# Altium PCB carteAction2026v1.PcbDoc
Units mm, origin at the board's own origin, x right, y up, seen from the top; angles counter-clockwise.
Board outline 121.28 x 58.42 mm, 2 copper layers (Top Layer, Bottom Layer); 49 components, 46 nets, 177 pads, 2 vias.
Unrouted connection lines stored in the file: 1.
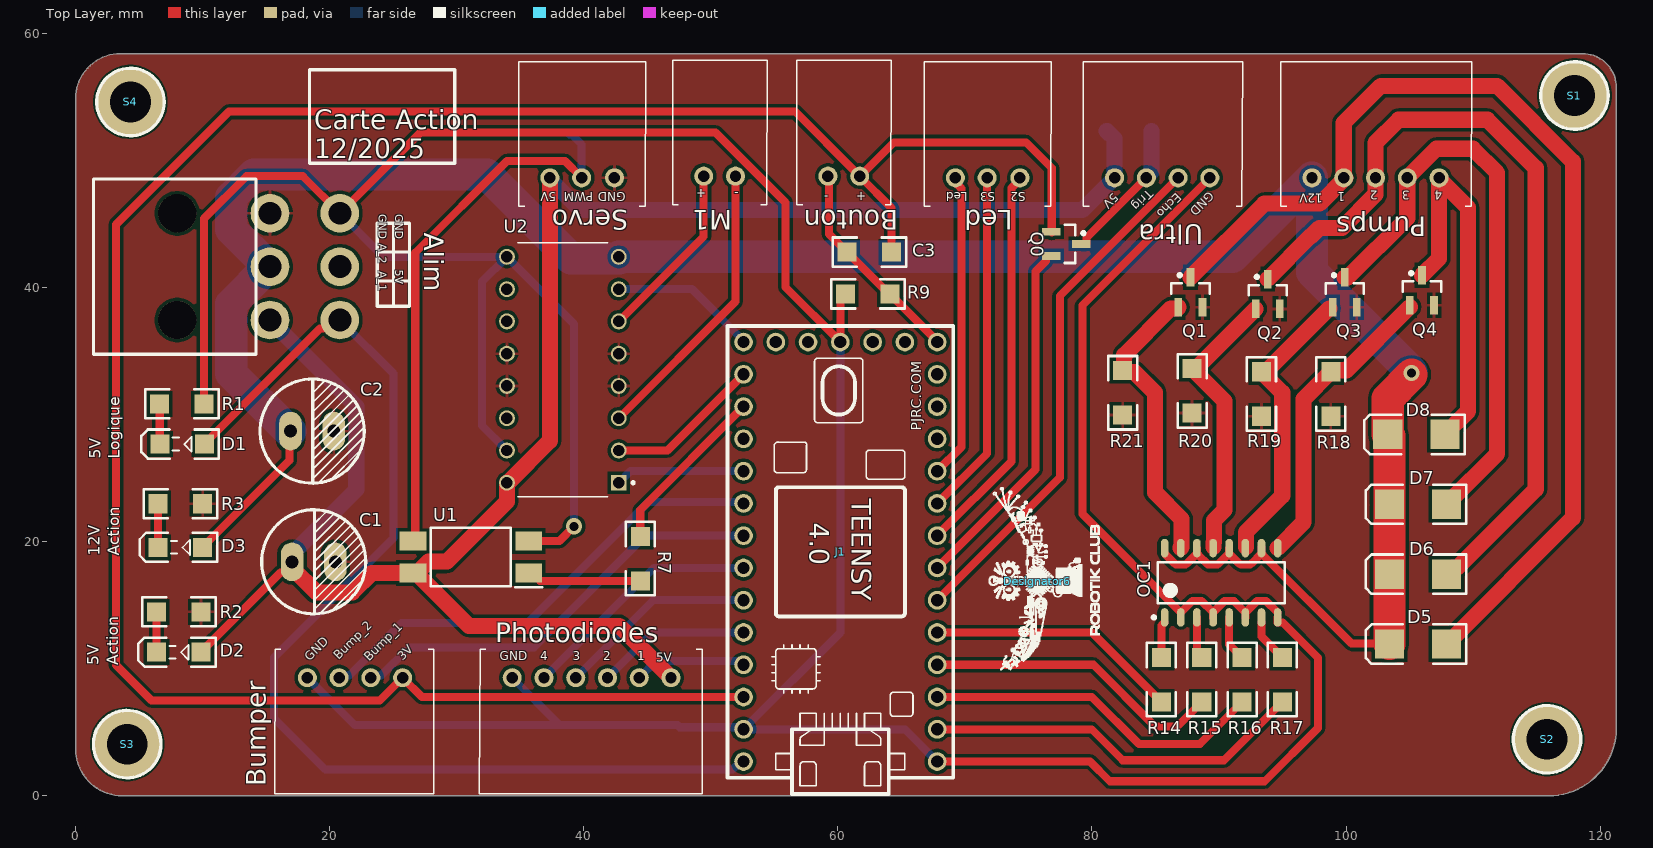
[diagram p0: Top Layer view]
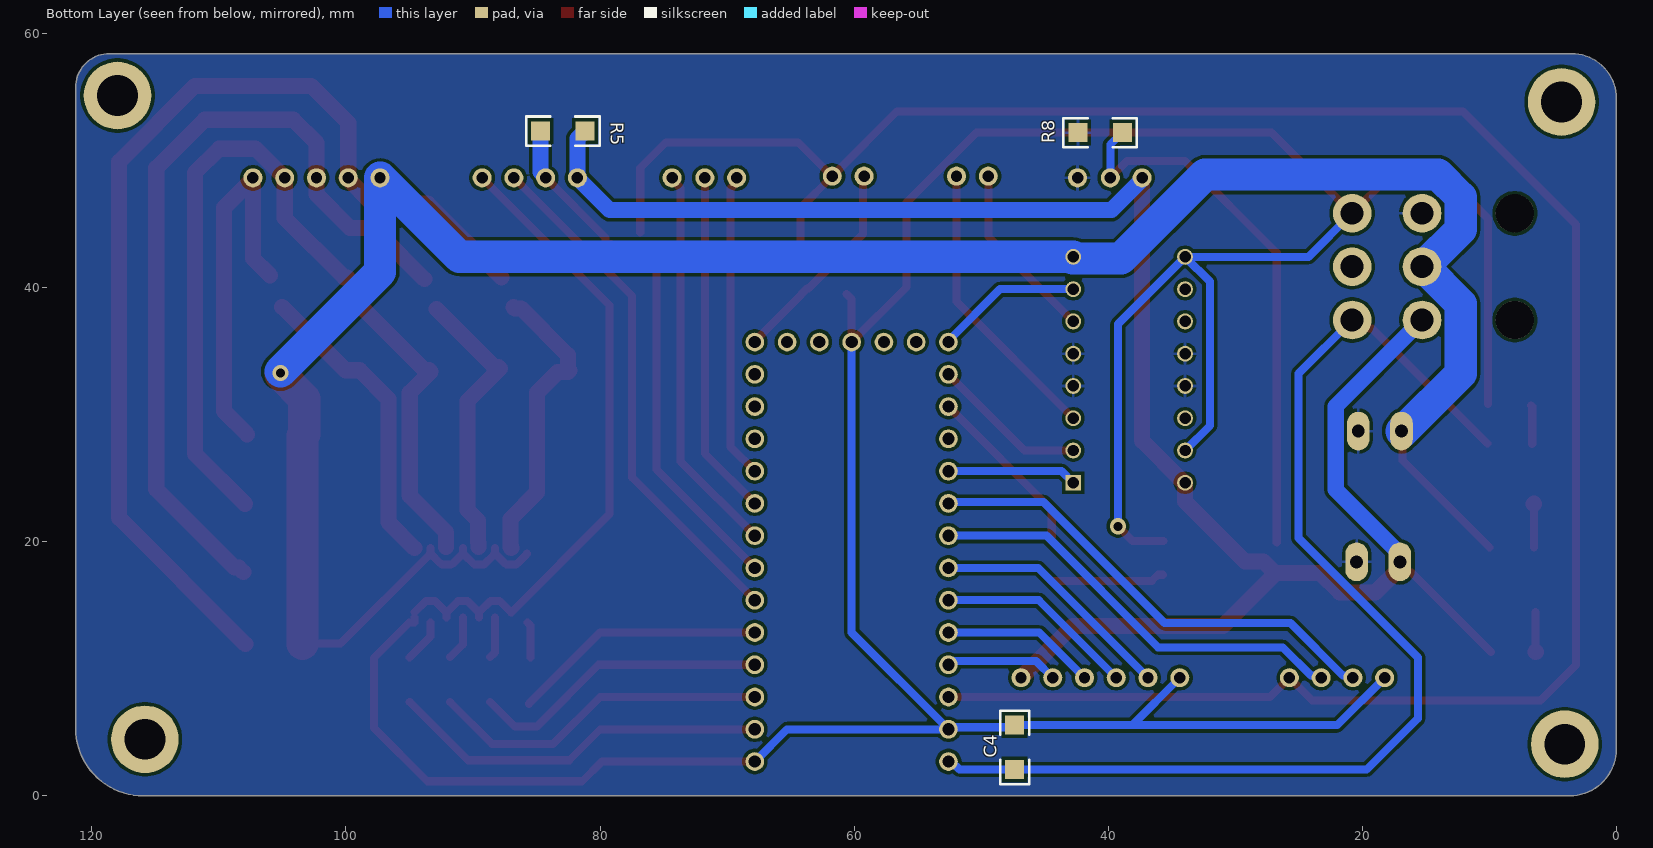
[diagram p1: Bottom Layer view, seen from below]
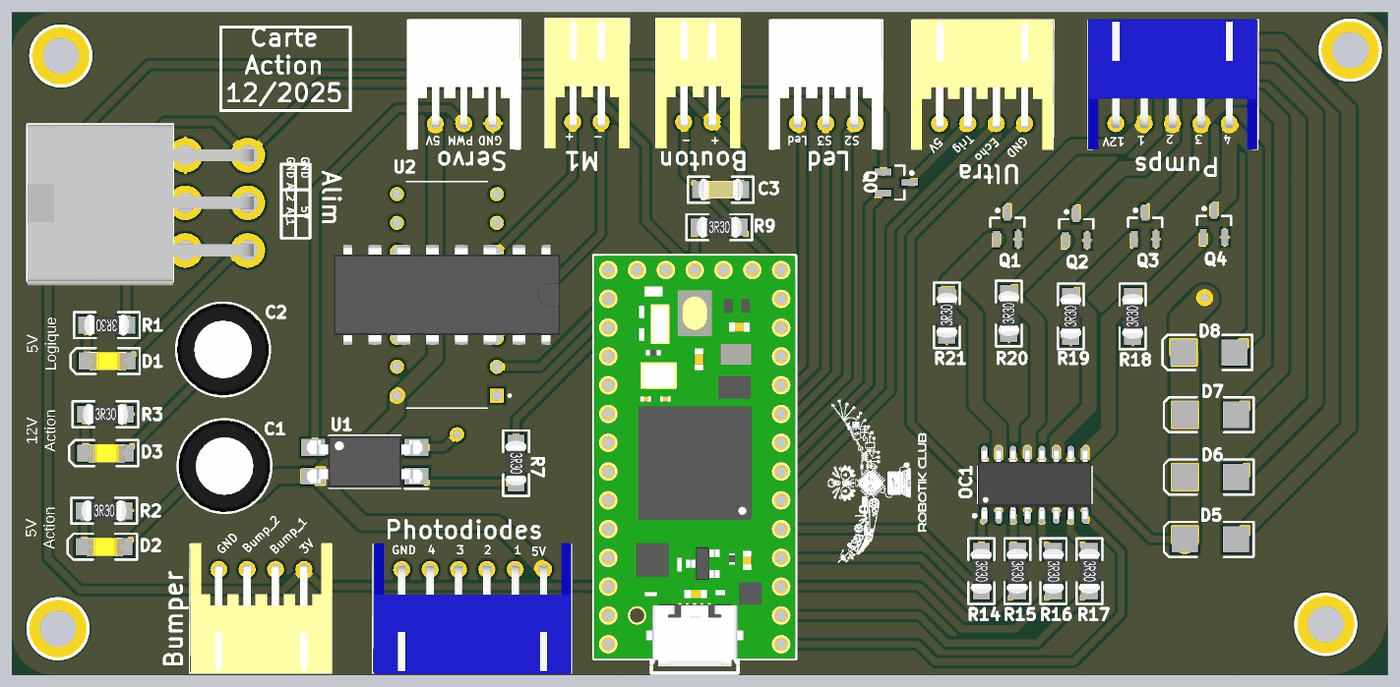
[diagram p2: 3D render of the assembled board from above, using the file's embedded part models]
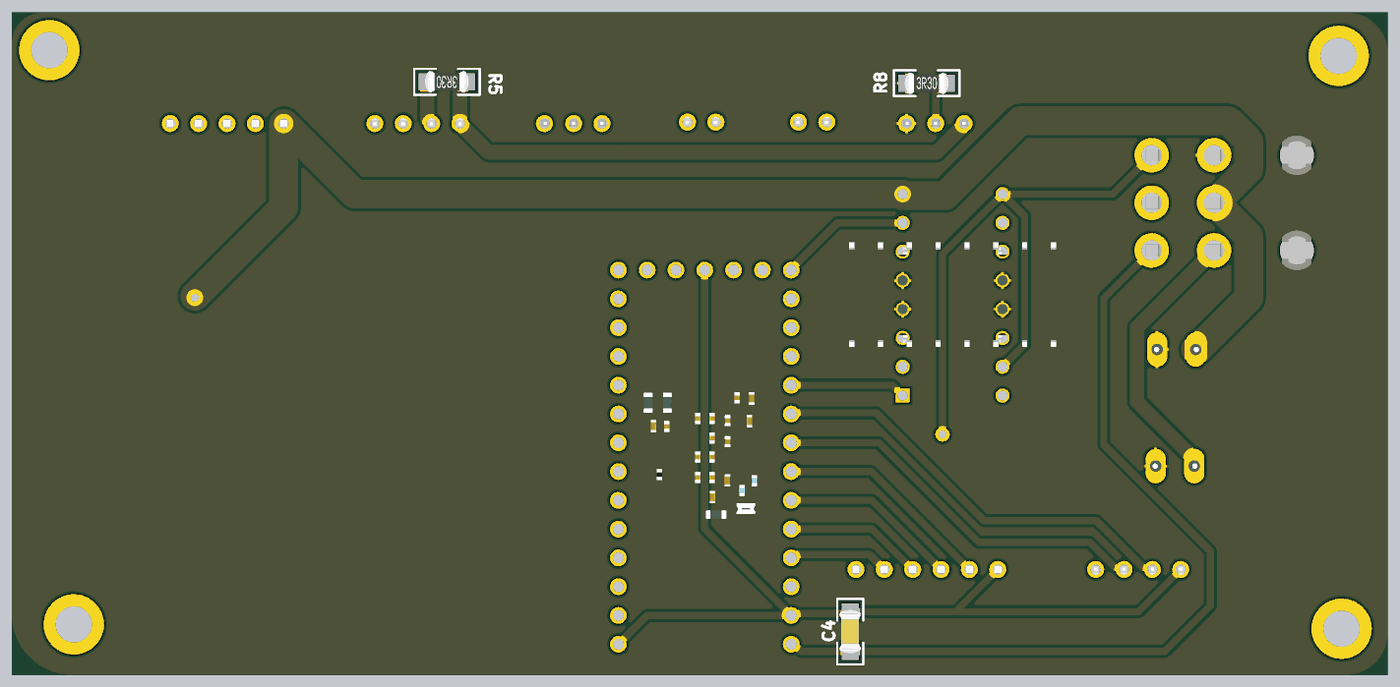
[diagram p3: 3D render of the assembled board from below, using the file's embedded part models]

## Layer stack, top to bottom
Top Solder: solder mask 0.0102, Solder Resist, Dk 3.5
Top Layer: signal copper 0.0356
Dielectric 1: dielectric 0.32, FR-4, Dk 4.8
Bottom Layer: signal copper 0.0356
Bottom Solder: solder mask 0.0102, Solder Resist, Dk 3.5

## Board outline
3.683,0 115.951,0 ccw(c115.951,5.334) 121.285,5.334 121.285,55.753 ccw(c118.618,55.753) 118.618,58.42 3.556,58.42 ccw(c3.556,54.864) 0,54.864 0,3.683 ccw(c3.683,3.683)

## Design rules (kind name [scope] priority, off if disabled: settings)
Clearance [All] p1: gap=0.254 ignorepadtopadclearanceinfootprint=FALSE
PolygonConnect [All] p1: connectstyle=Relief reliefconductorwidth=0.254 reliefentries=4 polygonreliefangle="90 Angle" airgapwidth=0.254
RoutingVias [All] p1: holewidth=0.711 width=1.27 viastyle="Through Hole" minholewidth=0.711 minwidth=1.27 maxholewidth=0.711 maxwidth=1.27
SolderMaskExpansion [All] p1: expansion=0.102 istentingtop=FALSE
SupplyNets "Schematic Supply Nets_5" [InNet('5V_A')] p1: voltage=0.000
SupplyNets "Schematic Supply Nets_4" [InNet('GND_A')] p2: voltage=0.000
SupplyNets "Schematic Supply Nets_3" [InNet('12V_A')] p3: voltage=0.000
SupplyNets "Schematic Supply Nets_2" [InNet('5V_L')] p4: voltage=0.000
SupplyNets "Schematic Supply Nets_1" [InNet('GND_L')] p5: voltage=0.000
SupplyNets "Schematic Supply Nets" [InNet('3V_L')] p6: voltage=0.000
Width [InNetClass('Pumps')] p1: maxlimit=2.54 minlimit=0.254 preferedwidth=1.27 minimp=50.000000 maximp=50.000000 favimp=50.000000
30 further rules are at their usual default settings.

## Classes and differential pairs
component class CarteAction_PontLevis2026: Bumper D5 D6 D7 D8 Led M1 OC1 Photodiodes Pumps Q1 Q2 Q3 Q4 R14 R15 R16 R17 R18 R19 R20 R21 U2
component class CarteAction2026: Alim Bouton C1 C2 C3 C4 D1 D2 D3 J1 Q0 R1 R2 R3 R5 R7 R8 R9 S1 S2 S3 S4 Servo U1 Ultra

## Components (designator, comment, footprint, x,y, rotation, side; value= is the part's Value field where it differs from the comment)
Alim "Header 3X2H" MOLEX_MINIFITJR_3X2 15.301,41.647 r270 top
Bouton "Header 2H" S2B-XH-A 59.222,48.768 r0 top
Bumper "Header 4H" S4B-XH-A 25.741,9.293 r180 top
C1 "Cap2" Condensateur 17.047,18.415 r0 top value=100µF
C2 "Cap2" Condensateur 16.92,28.702 r0 top value=100µF
C3 "Cap" "Capacitor 1206" 62.484,42.799 r180 top value=10nf
C4 "(Optional)" "Capacitor 1206" 47.371,3.81 r270 bottom value=10uF
D1 "5V_L" KP-3216SEC 8.382,27.686 r180 top
D2 "5V_A" KP-3216SEC 8.128,11.303 r180 top
D3 "12V_A" KP-3216SEC 8.255,19.558 r180 top
D5 "LGE SS12" SMB 105.664,11.938 r180 top
D6 "LGE SS12" SMB 105.664,17.441 r180 top
D7 "LGE SS12" SMB 105.664,22.945 r180 top
D8 "LGE SS12" SMB 105.537,28.448 r180 top
Designator6 "Comment" Logo_lowres 75.692,16.891 r90 top
J1 "TEENSY_4.0" TEENSY_4.0 60.198,19.202 r90 top
Led "Header 3" S3B-XH-A 69.255,48.641 r0 top (schematic designator S_23LED)
M1 "M1" S2B-XH-A 49.443,48.768 r0 top
OC1 "PhotoCoupler" "16 pins SOIC, TI" 90.17,16.764 r90 top
Photodiodes "Header 6H" S6B-XH-A 46.87,9.293 r180 top
Pumps "Header 5H" S5B-XH-A 97.322,48.641 r0 top
Q0 "MOSFET-N" SOT23_M 77.978,43.434 r0 top
Q1 "MOSFET-N" SOT23_M 87.757,39.624 r90 top
Q2 "MOSFET-N" SOT23_M 93.831,39.497 r90 top
Q3 "MOSFET-N" SOT23_M 99.905,39.624 r90 top
Q4 "MOSFET-N" SOT23_M 105.979,39.783 r90 top
R1 "Res2" "Resistor 1206" 8.37,30.853 r180 top value=300
R2 "Res2" "Resistor 1206" 8.128,14.478 r0 top value=300
R3 "Res2" "Resistor 1206" 8.255,22.987 r0 top value=1K3
R5 "Res2" "Resistor 1206" 82.931,52.324 r0 bottom value=10K
R7 "210" "Resistor 1206" 44.45,18.669 r270 top
R8 "Res2" "Resistor 1206" 40.64,52.197 r180 bottom value=10K
R9 "Res2" "Resistor 1206" 62.357,39.497 r0 top value=10K
R14 "Res2" "Resistor 1206" 85.471,9.144 r270 top value=210
R15 "Res2" "Resistor 1206" 88.646,9.144 r270 top value=210
R16 "Res2" "Resistor 1206" 91.821,9.144 r270 top value=210
R17 "Res2" "Resistor 1206" 94.996,9.144 r270 top value=210
R18 "Res2" "Resistor 1206" 98.806,31.623 r90 top value=10K
R19 "Res2" "Resistor 1206" 93.345,31.623 r90 top value=10K
R20 "Res2" "Resistor 1206" 87.884,31.877 r90 top value=10K
R21 "Res2" "Resistor 1206" 82.423,31.722 r90 top value=10K
S1 "Screw M3" "Screw M3" 117.983,55.118 r90 top
S2 "Screw M3" "Screw M3" 115.824,4.445 r90 top
S3 "Screw M3" "Screw M3" 4.064,4.064 r90 top
S4 "Screw M3" "Screw M3" 4.318,54.61 r90 top
Servo "Header 3" S3B-XH-A 37.338,48.641 r0 top
U1 "FOD817S" SOP254P1016X385-4N 31.115,18.796 r180 top
U2 "L293D" DIP880W50P254L2000H510Q16 38.354,33.528 r180 top
Ultra "Header 4H" S4B-XH-A 81.781,48.641 r0 top

## Footprints (in the part's own frame and the unit in brackets; to place one, negate y for a bottom-side part, rotate by r counter-clockwise, add the part's x,y. Pads: shape width x height; smd on the part's side, far side on the other; paste and mask are expansions set on the pad)
"16 pins SOIC, TI" [mm] "SOIC, 16-Leads, Body 9,90x3,90mm, Pitch 1,27mm, IPC Medium Density"
  oval 1.45x0.6 smd: 1(-2.725,4.445) 2(-2.725,3.175) 3(-2.725,1.905) 4(-2.725,0.635) 5(-2.725,-0.635) 6(-2.725,-1.905) 7(-2.725,-3.175) 8(-2.725,-4.445) 9(2.725,-4.445) 10(2.725,-3.175) 11(2.725,-1.905) 12(2.725,-0.635) 13(2.725,0.635) 14(2.725,1.905) 15(2.725,3.175) 16(2.725,4.445)
  silkscreen extent -2.85,-5 1.6,5.42, body extent -3,-5 3,5, height 1.75
"Capacitor 1206" [mm]
  rect 1.5x1.5 smd: 1(-1.75,0) 2(1.75,0)
  silkscreen extent -2.89,-1.14 2.89,1.14, body extent -1.97,-0.99 1.97,0.96, height 1.3
Condensateur [mil]
  oval 70x120 hole 40: 1(0,0) 2(133.86,0)
  silkscreen extent -94,-161 228,161, body extent -93,-160 227,160, height 500
DIP880W50P254L2000H510Q16 [mm]
  rect 1.25x1.25 / inner round 1.25 / far side rect 1.25x1.25 hole 0.9: 1(-4.4,8.89)
  round 1.25 hole 0.9: 2(-4.4,6.35) 3(-4.4,3.81) 4(-4.4,1.27) 5(-4.4,-1.27) 6(-4.4,-3.81) 7(-4.4,-6.35) 8(-4.4,-8.89) 9(4.4,-8.89) 10(4.4,-6.35) 11(4.4,-3.81) 12(4.4,-1.27) 13(4.4,1.27) 14(4.4,3.81) 15(4.4,6.35) 16(4.4,8.89)
  silkscreen extent -5.63,-10 3.55,10, body extent -10,-4.62 10,4.62, height 5.1
KP-3216SEC [mm]
  rect 1.5x1.5 smd: 1(-1.75,0) 2(1.75,0)
  silkscreen extent -2.89,-1.14 3.2,1.14, body extent -1.7,-0.79 1.5,0.81, height 1.1
Logo_lowres [mm]
  silkscreen extent -7.01,-4.93 7.39,3.76
MOLEX_MINIFITJR_3X2 [mm] "MOLEX_MINIFITJR_3X2, 39-30-1060"
  round 3.048 hole 1.8: 1(-4.2,5.5) 2(-4.2,0) 3(0,5.5) 4(0,0) 5(4.2,5.5) 6(4.2,0)
  round 3 hole 3 unplated: 10(-4.2,-7.3) 11(4.2,-7.3)
  silkscreen extent -6.9,-13.9 6.9,-1.1, body extent -6.9,-13.9 7.3,6.04, height 11.41
"Resistor 1206" [mm]
  rect 1.5x1.5 smd: 1(-1.75,0) 2(1.75,0)
  silkscreen extent -2.89,-1.14 2.89,1.14, body extent -1.98,-0.95 1.98,0.93, height 0.55
S2B-XH-A [mm]
  round 1.5 hole 0.9: 1(0,0) 2(2.5,0)
  silkscreen extent -2.45,-2.26 5,9.14, body extent -2.41,-2.32 4.99,9.18, height 6.15
S3B-XH-A [mm]
  round 1.5 hole 0.9: 1(0,0) 2(2.5,0) 3(5.08,0)
  silkscreen extent -2.45,-2.26 7.54,9.14, body extent -2.44,-2.27 7.46,9.23, height 6.15
S4B-XH-A [mm]
  round 1.5 hole 0.9: 1(0,0) 2(2.5,0) 3(5,0) 4(7.5,0)
  silkscreen extent -2.45,-2.26 10.08,9.14, body extent -2.44,-2.32 9.96,9.18, height 6.15
S5B-XH-A [mm]
  round 1.5 hole 0.9: 1(0,0) 2(2.5,0) 3(5,0) 4(7.5,0) 5(10,0)
  silkscreen extent -2.45,-2.26 12.58,9.14, body extent -2.45,-2.3 12.45,9.2, height 6.15
S6B-XH-A [mm]
  round 1.5 hole 0.9: 1(0,0) 2(2.5,0) 3(5,0) 4(7.5,0) 5(10,0) 6(12.5,0)
  silkscreen extent -2.45,-2.26 15.08,9.14, body extent -2.45,-2.3 14.95,9.2, height 6.15
"Screw M3" [mm] "M3 iso Screw"
  round 5.32 hole 3.2 unplated: 0(0,0)
  silkscreen extent -2.66,-2.66 2.66,2.66
SMB [mm] "DO-214-AA/SMB; 2 C-Bend Leads; Body 5.3 x 3.6 mm, inc. leads (LxW)"
  rect 2.3x2.3 smd: 1(-2.25,0) 2(2.25,0)
  silkscreen extent -3.8,-1.55 4.1,1.55
SOP254P1016X385-4N [mm]
  rect 2.1x1.5 smd: 1(-4.55,1.27) 2(-4.55,-1.27) 3(4.55,-1.27) 4(4.55,1.27)
  silkscreen extent -5.6,-2.3 3.15,2.37, body extent -5.08,-2.3 5.08,2.3, height 3.85
SOT23_M [mm] "SOT23, 3-Leads, Body 2.9x1.3mm, Pitch 0.95mm, Lead Span 2.3mm - Reverse Pinning, IPC Low Density"
  rect 1.45x0.6 smd: 1(1.175,0) 2(-1.175,-0.95) 3(-1.175,0.95)
  silkscreen extent -0.1,-1.5 1.48,1.5, body extent -0.7,-1.5 0.7,1.5, height 1.1
TEENSY_4.0 [mil]
  round 58 hole 38: 0/RX(-550,-300) 1/TX(-450,-300) 2(-350,-300) 3/CANTX(-250,-300) 3V3_LN(650,-100) 3V3_LO(-450,300) 4/CANRX(-150,-300) 5(-50,-300) 6(50,-300) 7(150,-300) 8(250,-300) 9/CS(350,-300) 10/CS(450,-300) 11/MOSI(550,-300) 12/MISO(650,-300) 13/SCK(650,300) 14/A0(550,300) 15/A1(450,300) 16/A2(350,300) 17/A3(250,300) 18/A4/SDA(150,300) 19/A5/SCL(50,300) 20/A6(-50,300) 21/A7(-150,300) 22/A8(-250,300) 23/A9(-350,300) GND(-650,-300) GND2(-550,300) GND3(650,0) ON/OFF(650,200) PROG(650,100) VBAT\(650,-200) VIN(-650,300)
  silkscreen extent -750,-350 700,350, body extent -728,-350 700,350, height 172

## Part data
Alim: "Header, 3-Pin, Dual row, Right Angle", LatestRevisionDate=17-Jul-2002, LatestRevisionNote="Re-released for DXP Platform.", Publisher="Altium Limited"
Bouton: "Header, 2-Pin, Right Angle", LatestRevisionDate=17-Jul-2002, LatestRevisionNote="Re-released for DXP Platform.", Publisher="Altium Limited"
Bumper Ultra: "Header, 4-Pin, Right Angle", LatestRevisionDate=17-Jul-2002, LatestRevisionNote="Re-released for DXP Platform.", Publisher="Altium Limited"
C1 C2 C3: "Capacitor", Publisher="Altium Limited"
  C1 C2: PackageDescription="Capacitor; 2 Leads", PackageReference=CAPR5-4X5, Published=23-Sep-2002
  C3: LatestRevisionDate=17-Jul-2002, LatestRevisionNote="Re-released for DXP Platform.", PackageDescription="Radial Cap, Thru-Hole; 2 Leads; 0.3 in Pin Spacing", PackageReference=RAD-0.3, Published=8-Jun-2000
C4: library part Cap, "Capacitor", LatestRevisionDate=17-Jul-2002, LatestRevisionNote="Re-released for DXP Platform.", PackageDescription="Radial Cap, Thru-Hole; 2 Leads; 0.3 in Pin Spacing", PackageReference=RAD-0.3, Published=8-Jun-2000, Publisher="Altium Limited"
D1 D2 D3: library part LED2, "Typical RED, GREEN, YELLOW, AMBER GaAs LED", LatestRevisionDate=17-Jul-2002, LatestRevisionNote="Re-released for DXP Platform.", PackageDescription="SM LED; 2 Flat Leads", PackageReference=3.2X1.6X1.1, PackageVersion=Feb-2002, Published=8-Jun-2000, Publisher="Altium Limited"
D5 D6 D7 D8: library part Diode, "Default Diode", Code_JEDEC=DO-214-AB, LatestRevisionDate=17-Jul-2002, LatestRevisionNote="Re-released for DXP Platform.", PackageDescription="DO-214-AB/SMC; 2 C-Bend Leads; Body 7.9 x 5.9 mm, inc. leads (LxW)", PackageReference=SMC, PackageVersion=Sep-1996, Published=8-Jun-2000, Publisher="Altium Limited"
J1: Package=None, Check_prices=https://www.snapeda.com/parts/Teensy%204.0/PJRC/view-part/?ref=eda, MF=PJRC, MP="Teensy 4.0", SnapEDA_Link=https://www.snapeda.com/parts/Teensy%204.0/PJRC/view-part/?ref=snap
Led Servo: "Header, 3-Pin", LatestRevisionDate=17-Jul-2002, LatestRevisionNote="Re-released for DXP Platform.", Publisher="Altium Limited"
M1: library part "Header 2H", "Header, 2-Pin, Right Angle", LatestRevisionDate=17-Jul-2002, LatestRevisionNote="Re-released for DXP Platform.", Publisher="Altium Limited"
OC1: library part LTV-247, "Integrated Circuit", Manufacturer_Name=Lite-On, Mouser Part Number=859-LTV-247, Arrow Part Number=LTV-247, Arrow Price/Stock=https://www.arrow.com/en/products/ltv-247/lite-on-technology, Datasheet Link=http://optoelectronics.liteon.com/upload/download/DS70-2009-0014/LTV-2X7%20sereis%20Mar17.PDF, Manufacturer_Part_Number=LTV-247, Mouser Price/Stock=https://www.mouser.co.uk/ProductDetail/Lite-On/LTV-247/?qs=9ayhpukWNmvWpoxQBzWkFA%3D%3D
Photodiodes: "Header, 6-Pin, Right Angle", LatestRevisionDate=17-Jul-2002, LatestRevisionNote="Re-released for DXP Platform.", Publisher="Altium Limited"
Pumps: "Header, 5-Pin, Right Angle", LatestRevisionDate=17-Jul-2002, LatestRevisionNote="Re-released for DXP Platform.", Publisher="Altium Limited"
Q0 Q1 Q2 Q3 Q4: "N-Channel MOSFET", LatestRevisionDate=17-Jul-2002, LatestRevisionNote="Re-released for DXP Platform.", PackageDescription="TO, Flat Index; 3 In-Line, Axial Leads; Body Dia. 4.6mm; Lead Dia. 0.5 mm (max)", PackageReference=E3, PackageVersion=1995/1996, Published=8-Jun-2000, Publisher="Altium Limited"
R1 R2 R3 R5 R8 R9 R14 R15 R16 R17 R18 R19 R20 R21: "Resistor", LatestRevisionDate=17-Jul-2002, LatestRevisionNote="Re-released for DXP Platform.", PackageDescription="Axial Device, Thru-Hole; 2 Leads; 0.4 in Pin Spacing", PackageReference=AXIAL-0.4, Published=8-Jun-2000, Publisher="Altium Limited"
R7: library part Res2, "Resistor", LatestRevisionDate=17-Jul-2002, LatestRevisionNote="Re-released for DXP Platform.", PackageDescription="Axial Device, Thru-Hole; 2 Leads; 0.4 in Pin Spacing", PackageReference=AXIAL-0.4, Published=8-Jun-2000, Publisher="Altium Limited"
U1: library part Optoisolator1, "4-Pin Phototransistor Optocoupler", DatasheetVersion=Nov-2003, LatestRevisionDate=04-Mar-2005, LatestRevisionNote="Sch pins 3 & 4 Swapped.", PackageReference=DIP-4, Published=24-Mar-1999, Publisher="Altium Limited"
U2: "Bipolar Motor Driver - Parallel 16-PowerDIP", Package="DIP-16 STMicroelectronics", Availability="In Stock", Check_prices=https://www.snapeda.com/parts/L293D/STMicroelectronics/view-part/?ref=eda, MF=STMicroelectronics, MP=L293D, Price=None, Purchase-URL=https://pricing.snapeda.com/search/part/L293D/?ref=eda, SnapEDA_Link=https://www.snapeda.com/parts/L293D/STMicroelectronics/view-part/?ref=snap

## Via types
v1: diameter 1.27, hole 0.711, Top Layer to Bottom Layer, 2 vias

## Nets (pads, with @x,y where several pads share a name; then routed paths per layer and width w, separated by ;. In a path a pad name is that pad's centre, name@x,y a point inside that pad or via, vN(x,y) a via of type N, cw(c..) or ccw(c..) an arc to the next point about the centre after c; other vN are vias at no path point)
3V_L: Bouton.2 Bumper.1 C3.1 J1.3V3_LO Q0.3 | length 179.9
  Top Layer w0.635: J1.3V3_LO@52.578,7.874 52.476,7.772 27.262,7.772 Bumper.1 23.941,7.493 5.969,7.493 3.175,10.287 3.175,44.958 12.065,53.848 56.642,53.848 61.468,49.022 Bouton.2@61.468,48.895 ; Bouton.2 64.234,46.256 C3.1 ; Bouton.2@61.741,48.768 64.408,51.435 74.803,51.435 76.835,49.403 Q0.3@76.835,44.323
5V_A: Alim.6 C1.1 D2.1 Photodiodes.1 R5.1 Servo.1 U1.4 U2.16 Ultra.1 | length 155.6
  Top Layer w0.635: D2.1 16.136,17.561 16.519,17.561 17.018,18.06 C1.1@17.018,18.415
  Top Layer w1.27: C1.1@17.047,17.917 18.962,16.002 21.794,16.002 23.318,17.526 U1.4@26.543,17.526 ; U1.4 U1.4@26.865,17.526 ; U2.16 33.954,23.159 29.222,18.427 27.766,18.427 U1.4@26.865,17.526 ; U2.16@34.036,24.638 37.338,27.94 Servo.1 ; Photodiodes.1 42.795,13.368 30.955,13.368 26.98,17.343 26.98,17.411 U1.4@26.865,17.526
  Bottom Layer w1.27: Alim.6@15.367,37.465 15.367,37.381 22.098,30.65 22.098,24.101 17.047,19.05 C1.1 ; Servo.1@37.338,48.514 39.751,46.101 79.241,46.101 Ultra.1 81.781,51.724 R5.1 R5.1@81.153,52.324
5V_L: Alim.5 C4.2 D1.1 J1.VIN | length 90.5
  Top Layer w0.635: D1.1@10.165,27.719 19.231,36.785 19.486,36.785 20.148,37.447 Alim.5
  Bottom Layer w0.635: Alim.5@20.828,37.465 20.828,37.42 25.019,33.229 25.019,20.287 15.621,10.889 15.621,6.096 19.657,2.06 C4.2 51.719,2.06 52.326,2.667 J1.VIN@52.578,2.667
12V_A: Alim.4 C2.1 D3.1 D5.2 D6.2 D7.2 D8.2 OC1.10 OC1.12 OC1.14 OC1.16 Pumps.1 U2.8 | length 190.6
  Top Layer w0.635: D3.1 16.823,26.376 C2.1@16.823,28.634 ; OC1.16@85.743,19.081 85.788,19.035 85.788,18.989 86.495,18.282 86.541,18.282 86.631,18.192 87.359,18.192 87.449,18.282 87.495,18.282 88.201,18.989 88.201,19.035 OC1.14@88.247,19.081 ; OC1.14 88.265,19.099 88.328,19.035 88.328,18.989 89.125,18.192 89.899,18.192 OC1.12@90.787,19.081 ; OC1.12 90.805,19.099 90.868,19.035 90.868,18.989 91.575,18.282 91.621,18.282 91.711,18.192 92.439,18.192 92.529,18.282 92.575,18.282 93.281,18.989 93.281,19.035 OC1.10@93.327,19.081 ; OC1.10 93.345,19.099 93.408,19.035 93.408,18.989 100.424,11.974 D5.2@103.378,11.974
  Top Layer w1.27: C2.1@16.823,28.634 C2.1@16.891,28.702
  Top Layer w2.54: D8.2 103.287,31.278 v1@105.156,33.147 ; D5.2 D6.2 D7.2@103.414,22.824 ; D7.2 D8.2@103.414,28.321
  Bottom Layer w2.54: Alim.4 15.19,41.647 12.253,44.584 12.253,47.11 14.038,48.895 32.385,48.895 38.989,42.291 U2.8@42.799,42.291 ; Alim.4@15.367,41.656 15.199,41.656 12.253,38.71 12.253,33.242 16.793,28.702 C2.1 ; U2.8 91.059,42.418 Pumps.1@97.282,48.641 ; Pumps.1 97.322,41.235 v1@105.156,33.401
  other v1: 105.156,33.274
enable: J1.17/A3 U2.1 | length 10.2
  Bottom Layer w0.635: U2.1 43.668,25.552 J1.17/A3
GND_A: Alim.2 C1.2 C2.2 Q1.2 Q2.2 Q3.2 Q4.2 R2.2 R3.2 R8.1 R18.1 R19.1 R20.1 R21.1 Servo.3 U2.4 U2.5 U2.12 U2.13
GND_L: Alim.1 Bumper.4 C4.1 J1.GND J1.GND2 J1.GND3 OC1.2 OC1.4 OC1.6 OC1.8 Photodiodes.6 R1.1 R9.1 U1.2 U2.9 U2.10 U2.15 Ultra.4 | length 329.3
  Top Layer w0.635: R1.1 10.12,45.426 13.462,48.768 17.88,48.768 Alim.1 27.151,52.197 50.383,52.197 55.883,46.697 55.883,40.027 J1.GND3 60.198,39.088 R9.1 ; U1.2 38.1,20.066 v1(39.243,21.209) ; J1.GND 79.858,2.692 81.407,1.143 93.599,1.143 97.79,5.334 97.79,10.864 95.022,13.631 94.633,13.631 94.615,13.649 OC1.8 ; OC1.2@86.977,14.446 79.248,22.176 79.248,38.608 Ultra.4 ; OC1.2@86.995,14.429 87.902,15.335 88.628,15.335 OC1.4@89.517,14.446 ; OC1.4 89.535,14.429 90.442,15.335 91.168,15.335 OC1.6@92.057,14.446 ; OC1.6 92.075,14.429 92.982,15.335 93.708,15.335 OC1.8@94.597,14.446
  Bottom Layer w0.635: Bumper.4@18.161,9.271 18.263,9.271 21.974,5.56 38.103,5.56 ; Alim.1 24.23,42.418 33.782,42.418 U2.9@33.909,42.291 ; U2.9@33.909,42.418 33.909,42.373 32.004,40.468 32.004,29.128 U2.15 ; U2.9 39.243,37.129 v1@39.243,21.336 ; Photodiodes.6@34.417,9.271 34.417,9.246 38.103,5.56 ; J1.GND2@52.578,5.207 52.392,5.393 47.538,5.393 C4.1 38.103,5.56 ; J1.GND3@60.071,35.687 60.198,35.56 60.198,12.852 J1.GND2 65.278,5.232 J1.GND
NetD1_2: D1.2 R1.2 | length 3.1
  Top Layer w0.635: D1.2 6.626,27.692 6.626,30.629 R1.2@6.731,30.734
NetD2_2: D2.2 R2.1 | length 3.2
  Top Layer w0.635: D2.2@6.378,11.331 R2.1
  Top Layer w1.27: D2.2@6.35,11.303 D2.2@6.378,11.331
NetD3_2: D3.2 R3.1 | length 3.4
  Top Layer w0.635: D3.2 R3.1@6.505,22.959
  Top Layer w1.27: R3.1@6.477,22.987 R3.1@6.505,22.959
NetM1_1: M1.1 U2.6 | length 14.2
  Top Layer w0.635: U2.6 49.443,44.027 M1.1
NetM1_2: M1.2 U2.3 | length 22.9
  Top Layer w0.635: U2.3 51.943,38.907 M1.2
NetOC1_1: OC1.1 R14.1 | length 2.8
  Top Layer w0.635: R14.1 85.471,13.395 OC1.1@85.707,13.631
NetOC1_3: OC1.3 R15.1 | length 3.3
  Top Layer w0.635: OC1.3 88.283,14.021 88.283,11.285 R15.1@88.646,10.922
NetOC1_5: OC1.5 R16.1 | length 3.6
  Top Layer w0.635: OC1.5 90.805,11.91 91.793,10.922 R16.1@91.821,10.922
NetOC1_7: OC1.7 R17.1 | length 3.4
  Top Layer w0.635: OC1.7@93.345,13.631 93.345,12.545 R17.1
NetR7_2: R7.2 U1.1 | length 9
  Top Layer w0.635: U1.1@35.687,17.399 36.092,17.399 36.572,16.919 R7.2
O_Pump_1: OC1.15 Q1.3 R21.2 | length 23.5
  Top Layer w1.27: Q1.3 86.717,38.359 86.208,38.359 82.538,34.689 82.538,33.587 R21.2 82.538,33.357 83.344,33.357 84.963,31.738 84.963,23.876 87.058,21.78 87.058,19.977 87.039,19.958 87.039,19.579 86.995,19.535 OC1.15
O_Pump_2: OC1.13 Q2.3 R20.2 | length 22.4
  Top Layer w1.27: OC1.13@89.579,19.579 89.579,19.958 89.599,19.977 89.599,21.653 90.424,22.479 90.424,31.087 R20.2 87.999,33.742 88.301,33.742 Q2.3
O_Pump_3: OC1.11 Q3.3 R19.2 | length 23.1
  Top Layer w1.27: OC1.11@92.119,19.579 92.119,20.745 94.984,23.61 94.984,31.734 R19.2 ; R19.2@93.345,33.401 R19.2 ; Q3.3@98.684,38.359 93.813,33.488 93.46,33.488 R19.2
O_Pump_4: OC1.9 Q4.3 R18.2 | length 24
  Top Layer w1.27: OC1.9 96.653,21.527 96.653,31.22 R18.2 98.921,33.488 100.036,33.488 Q4.3@105.029,38.481
O_PWM: R8.2 Servo.2 U1.3 | length 43.4
  Top Layer w0.635: U1.3@26.738,19.939 26.738,42.74 33.961,49.963 38.516,49.963 Servo.2
  Bottom Layer w0.635: R8.2@38.862,52.07 39.017,52.07 39.838,51.249 Servo.2
Pump_1: D5.1 Pumps.2 Q1.1 | length 83.6
  Top Layer w1.27: Q1.1 93.567,46.609 97.917,46.609 Pumps.2@99.949,48.641 ; Pumps.2 99.822,52.959 102.743,55.88 111.887,55.88 117.856,49.911 117.856,21.88 D5.1
Pump_2: D6.1 Pumps.3 Q2.1 | length 65.1
  Top Layer w1.27: Q2.1 97.228,44.069 97.282,44.069 97.915,44.702 99.693,44.702 102.322,47.331 102.322,51.395 104.14,53.213 111.125,53.213 114.935,49.403 114.935,24.13 108.761,17.956 108.429,17.956 D6.1@108.077,17.604
Pump_3: D7.1 Pumps.4 Q3.1 | length 46.5
  Top Layer w1.27: Q3.1 100.15,40.799 104.822,45.471 104.822,48.594 Pumps.4@104.775,48.641 ; Pumps.4@104.866,48.685 107.108,50.927 109.982,50.927 111.887,49.022 111.887,26.918 D7.1@107.95,22.981
Pump_4: D8.1 Pumps.5 Q4.1 | length 30.1
  Top Layer w1.27: Q4.1 107.322,42.301 107.322,48.634 Pumps.5@107.315,48.641 ; Pumps.5@107.315,48.586 109.601,46.3 109.601,30.262 D8.1
T_Bump_1: Bumper.2 J1.19/A5/SCL | length 34
  Bottom Layer w0.635: Bumper.2 23.407,9.459 24.038,9.459 26.263,11.684 36.068,11.684 44.856,20.472 J1.19/A5/SCL
T_Bump_2: Bumper.3 J1.18/A4/SDA | length 37.6
  Bottom Layer w0.635: Bumper.3 20.907,9.459 21.538,9.459 25.668,13.589 35.56,13.589 45.085,23.114 J1.18/A4/SDA@52.578,23.114
T_Homolog: Bouton.1 C3.2 J1.12/MISO R9.2 | length 16.5
  Top Layer w0.635: Bouton.1@59.309,48.641 59.309,44.224 C3.2 63.604,39.93 63.702,39.93 R9.2@64.135,39.497 ; R9.2@64.135,39.469 67.818,35.786 J1.12/MISO
T_LED: J1.8 Led.1 | length 23.9
  Top Layer w0.635: J1.8 69.723,27.457 69.723,47.812 69.255,48.28 Led.1@69.255,48.514
T_M_Sens1: J1.14/A0 U2.2 | length 12.4
  Top Layer w0.635: U2.2 46.584,27.178 J1.14/A0 J1.14/A0@52.578,33.274
T_M_Sens2: J1.13/SCK U2.7 | length 11.5
  Bottom Layer w0.635: U2.7 48.514,39.878 J1.13/SCK@52.578,35.814
T_OUT_1: J1.23/A9 Photodiodes.2 | length 8.9
  Bottom Layer w0.635: Photodiodes.2 45.692,10.614 52.049,10.614 52.377,10.287 J1.23/A9@52.578,10.287
T_OUT_2: J1.22/A8 Photodiodes.3 | length 12.2
  Bottom Layer w0.635: Photodiodes.3 45.429,12.852 J1.22/A8
T_OUT_3: J1.21/A7 Photodiodes.4 | length 15.7
  Bottom Layer w0.635: Photodiodes.4 45.469,15.392 J1.21/A7
T_OUT_4: J1.20/A6 Photodiodes.5 | length 19.3
  Bottom Layer w0.635: Photodiodes.5 45.509,17.932 J1.20/A6
T_Pump_1: J1.3/CANTX R14.2 | length 20.1
  Top Layer w0.635: J1.3/CANTX 80.013,12.852 85.598,7.267 R14.2@85.598,7.239
T_Pump_2: J1.2 R15.2 | length 23.6
  Top Layer w0.635: J1.2@67.843,10.312 80.112,10.312 84.963,5.461 86.713,5.461 R15.2
T_Pump_3: J1.1/TX R16.2 | length 26.9
  Top Layer w0.635: J1.1/TX 79.985,7.772 83.693,4.064 88.491,4.064 91.793,7.366 R16.2@91.821,7.366
T_Pump_4: J1.0/RX R17.2 | length 30.1
  Top Layer w0.635: J1.0/RX 79.985,5.232 82.423,2.794 90.396,2.794 94.968,7.366 R17.2@94.996,7.366
T_PWM: J1.15/A1 R7.1 | length 13.5
  Top Layer w0.635: R7.1 44.45,22.504 52.426,30.48 J1.15/A1@52.578,30.48
T_S2: J1.6 Led.3 | length 30.9
  Top Layer w0.635: J1.6 73.66,26.314 73.66,47.837 74.335,48.512 Led.3
T_S3: J1.7 Led.2 | length 27
  Top Layer w0.635: J1.7 71.755,26.949 Led.2@71.755,48.387
T_Ultra_Echo: J1.4/CANRX Ultra.3 | length 41.1
  Top Layer w0.635: J1.4/CANRX 77.47,25.044 77.47,39.33 Ultra.3
T_Ultra_Trig: J1.5 Q0.2 | length 28.1
  Top Layer w0.635: J1.5 75.565,25.679 75.565,41.275 76.396,42.106 Q0.2@76.396,42.467
Ultra_Trig: Q0.1 R5.2 Ultra.2 | length 11.4
  Top Layer w0.635: Q0.1 79.543,43.434 79.561,43.452 79.561,43.92 Ultra.2@84.269,48.629
  Bottom Layer w1.27: Ultra.2@84.219,48.641 84.681,49.103 R5.2
pads on no net: Alim.3 Alim.10 Alim.11 J1.3V3_LN J1.9/CS J1.10/CS J1.11/MOSI J1.16/A2 J1.ON/OFF J1.PROG J1.VBAT\ S1.0 S2.0 S3.0 S4.0 U2.11 U2.14

## Polygon pours and split planes (outlines as drawn)
GND_A on Top Layer "GND_A_L01_P000" (solid, remove dead copper, pour order 0): 3.683,0 115.951,0 ccw(c115.951,5.334) 121.285,5.334 121.285,55.753 ccw(c118.618,55.753) 118.618,58.42 3.556,58.42 ccw(c3.556,54.864) 0,54.864 0,3.683 ccw(c3.683,3.683)
GND_A on Bottom Layer "GND_A_L02_P001" (solid, remove dead copper, pour order 1): 3.683,0 115.951,0 ccw(c115.951,5.334) 121.285,5.334 121.285,55.753 ccw(c118.618,55.753) 118.618,58.42 3.556,58.42 ccw(c3.556,54.864) 0,54.864 0,3.683 ccw(c3.683,3.683)

## Silkscreen, mask and mechanical layers (free items; w line width, h text height)
Top Overlay:
  lines w0.254: 23.749,40.513 26.289,40.513 ; 23.749,42.799 26.289,42.799 ; 25.019,38.684 25.019,45.06 ; 18.415,49.784 29.845,49.784 29.845,57.15 18.415,57.15 18.415,49.784 ; 23.749,38.532 26.289,38.532 26.289,45.06 23.749,45.06 23.749,38.532
  text "Carte Action / 12/2025" at 18.798,50.165 h1.52
  text "Trig" at 84.39,47.775 h0.7 r225
  text "+" at 49.657,47.752 h0.7 r180
  text "-" at 52.197,47.721 h0.7 r180
  text "GND" at 89.185,47.622 h0.7 r225
  text "2" at 102.489,47.625 h0.7 r180
  text "3" at 105.029,47.625 h0.7 r180
  text "4" at 107.569,47.625 h0.7 r180
  text "5V" at 37.846,47.498 h0.7 r180
  text "PWM" at 40.767,47.498 h0.7 r180
  text "GND" at 43.307,47.498 h0.7 r180
  text "Led" at 70.231,47.498 h0.7 r180
  text "S3" at 72.39,47.498 h0.7 r180
  text "S2" at 74.803,47.498 h0.7 r180
  text "5V" at 81.692,47.495 h0.7 r225
  text "Echo" at 86.645,47.495 h0.7 r225
  text "1" at 99.949,47.498 h0.7 r180
  text "12V" at 98.171,47.371 h0.7 r180
  text "-" at 58.928,46.894 h0.7
  text "+" at 61.468,46.863 h0.7
  text "GND" at 23.876,45.771 h0.64 r270
  text "GND" at 25.146,45.771 h0.64 r270
  text "A_2" at 23.876,43.434 h0.64 r270
  text "5V" at 25.146,41.402 h0.64 r270
  text "A_1" at 23.876,41.275 h0.64 r270
  text "5V / Logique" at 3.81,26.545 h1.52 r90
  text "12V / Action" at 3.76,18.873 h1.52 r90
  text "Bump_2" at 20.701,10.668 h0.7 r45
  text "GND" at 33.401,10.668 h0.7
  text "4" at 36.576,10.668 h0.7
  text "3" at 39.116,10.668 h0.7
  text "2" at 41.529,10.668 h0.7
  text "1" at 44.196,10.668 h0.7
  text "3V" at 25.736,10.586 h0.7 r45
  text "GND" at 18.415,10.541 h0.7 r45
  text "Bump_1" at 23.114,10.541 h0.7 r45
  text "5V" at 45.72,10.551 h0.7
  text "5V / Action" at 3.683,10.289 h1.52 r90
Mechanical 1:
  lines w0.254: 0,55.372 0,3.683 ccw(c3.873,3.873) 4.064,0 116.078,0 ccw(c116.141,5.143) 121.285,5.08 121.285,55.753 ccw(c118.745,55.88) 118.872,58.42 3.937,58.42 ccw(c3.429,54.991) 0,55.499

## Text inside footprints (layer, text, board x,y; h text height)
J1: Top Overlay "PJRC.COM" at 66.548,28.727 h0.81 r90; Top Overlay "4.0" at 57.785,21.488 h1.52 r270; Top Overlay "TEENSY" at 61.087,23.393 h1.52 r270